# EAGLE board badge_2013 (EAGLE 6.4)
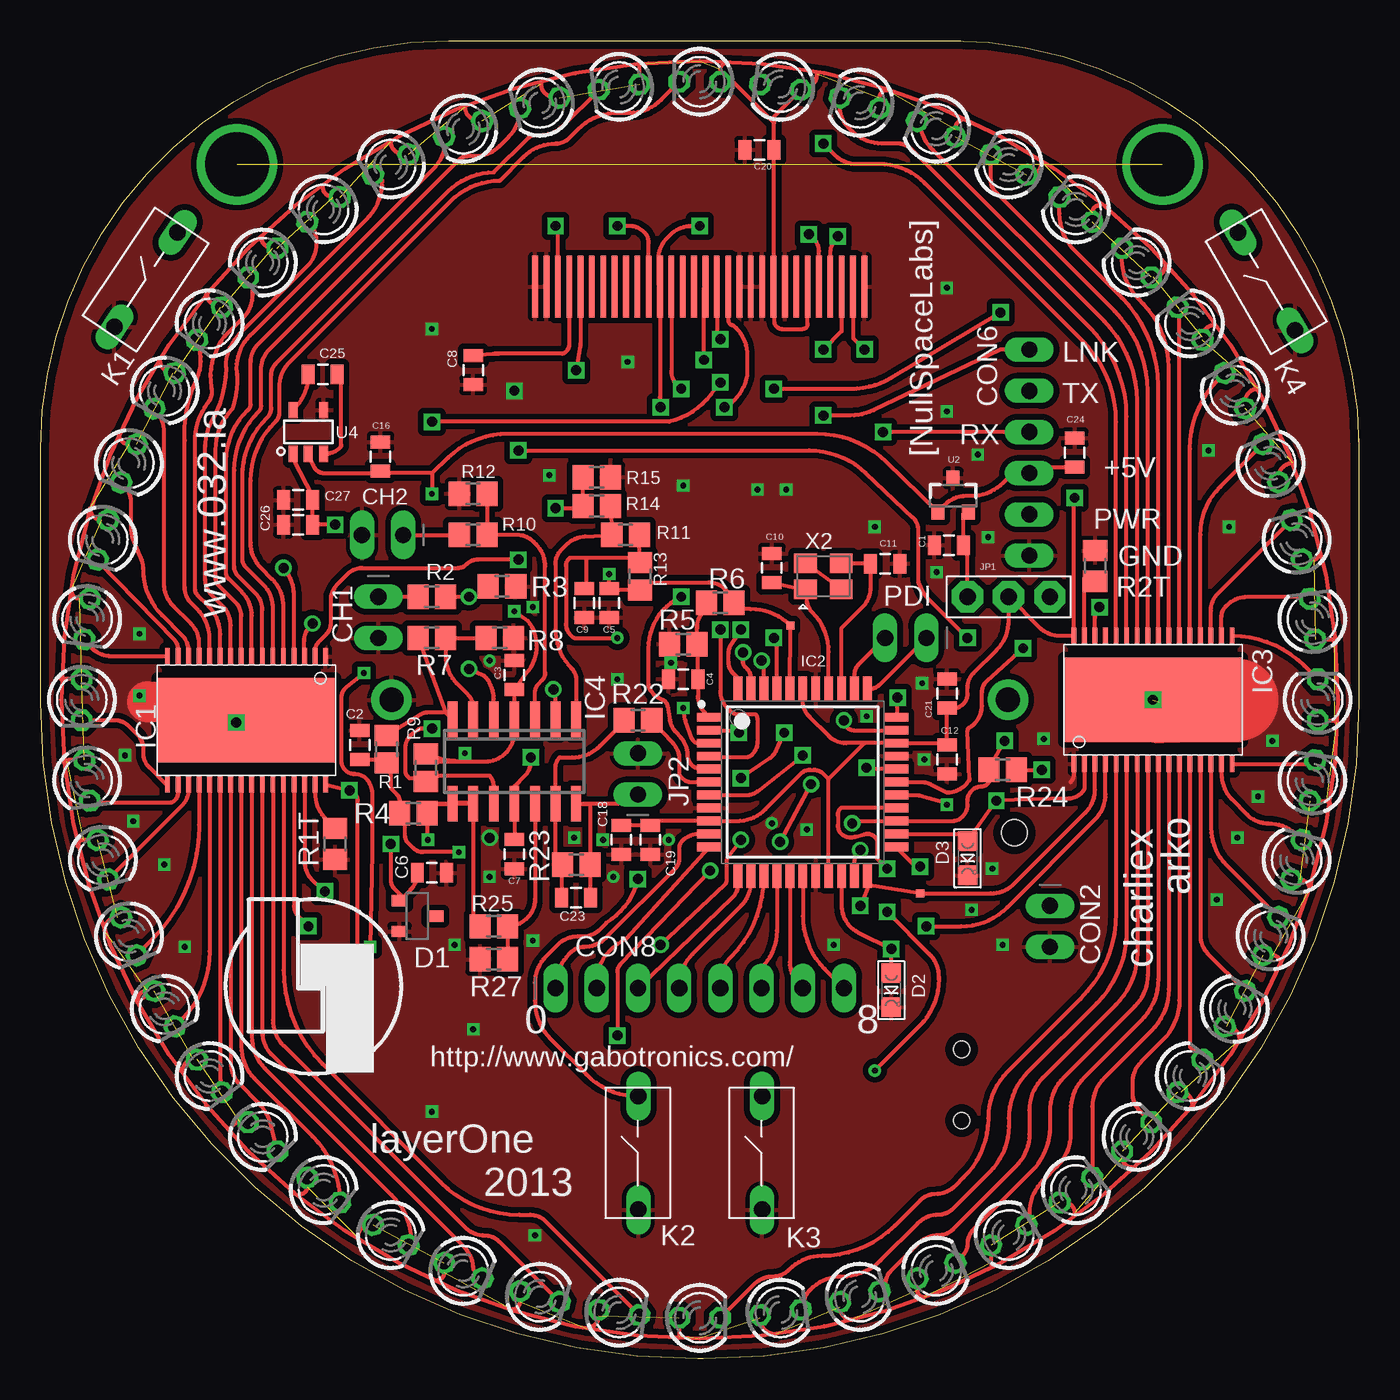
[diagram p0: board, top side]
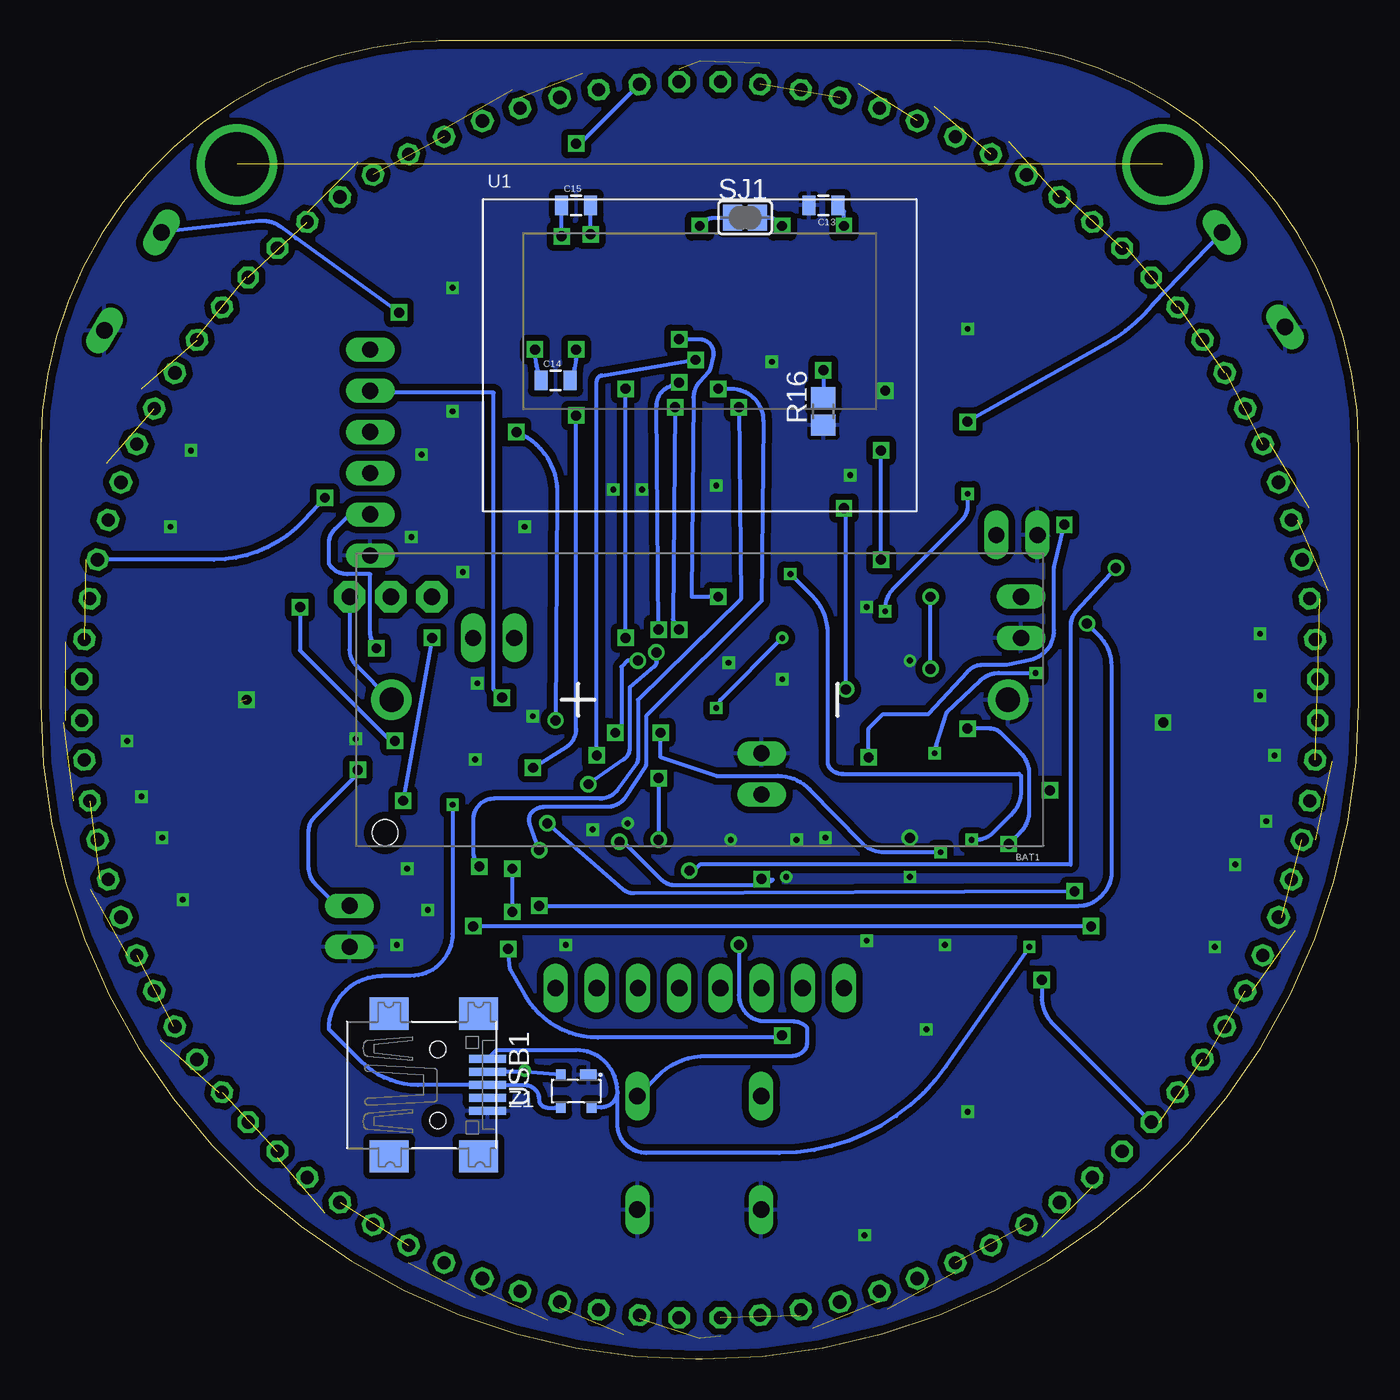
[diagram p1: board, bottom side, seen from below]

Size 81.28 x 81.28 mm. Coordinates in mm from the lower left corner, seen from the top.
Outline: 56.73,81.28 25.15,81.28 arc90 0,56.13 0,40.5 arc90 40.5,0 40.86,0 arc90 81.28,40.42 81.28,56.73
Outline: 56.13,81.28 arc-90 81.28,56.13
Copper layers (1*16): Top 0.0356mm / dielectric 1.5011mm / Bottom 0.0356mm
Design rules "SilverCircuits": minimum track width 7mil, minimum drill 14mil, track to track 7mil, track to pad 7mil, pad to pad 7mil, via to via 7mil, smd to smd 0mil, copper to edge 20mil, drill to drill 8mil, minimum pad ring 10mil, minimum via ring 8mil, stop-mask expansion 4mil, vias tented up to drill 0mil, thermal gap 10mil
Net classes: 0 default: width 0.254 mm, drill 0.305 mm, clearance 0.152 mm
Milling: 10 lines

## Footprints (pad centres in the part's own frame; a part is rotated, then mirrored left to right if it is on the bottom)
BATTERY_CR123A = drill 1.5 pad 2.5: + 19,0; - -19,0 | hole 1.575: 19.4,8.2
0805 = smd 0.8 x 1.2: 1 -0.9,0; 2 0.9,0
1X02_OVAL = drill 1 long: 1 -1.27,0; 2 1.27,0
1X06_OVAL = drill 1 long: 1 -6.35,0; 2 -3.81,0; 3 -1.27,0; 4 1.27,0; 5 3.81,0; 6 6.35,0
1X08_OVAL = drill 1 long: 1 -8.89,0; 2 -6.35,0; 3 -3.81,0; 4 -1.27,0; 5 1.27,0; 6 3.81,0; 7 6.35,0; 8 8.89,0
DBZ_R-PDSO-G3 = smd 0.7 x 1: 1 -0.95,-1.1; 2 0.95,-1.1; 3 0,1.1
CHIPLED_0805 = smd 1.2 x 1.2: A 0,-1.05; C 0,1.05
HTSSOP32DAP = smd 0.3 x 1: 1 -4.875,-3.95; 2 -4.225,-3.95; 3 -3.575,-3.95; 4 -2.925,-3.95; 5 -2.275,-3.95; 6 -1.625,-3.95; 7 -0.975,-3.95; 8 -0.325,-3.95; 9 0.325,-3.95; 10 0.975,-3.95; 11 1.625,-3.95; 12 2.275,-3.95; 13 2.925,-3.95; 14 3.575,-3.95; 15 4.225,-3.95; 16 4.875,-3.95; 17 4.875,3.95; 18 4.225,3.95; 19 3.575,3.95; 20 2.925,3.95; 21 2.275,3.95; 22 1.625,3.95; 23 0.975,3.95; 24 0.325,3.95; 25 -0.325,3.95; 26 -0.975,3.95; 27 -1.625,3.95; 28 -2.275,3.95; 29 -2.925,3.95; 30 -3.575,3.95; 31 -4.225,3.95; 32 -4.875,3.95 | smd 11 x 5.2: EXP 0,0
NONOLITH_TQFP-44 = smd 1.55 x 0.55: 1 -5.75,4; 2 -5.75,3.2; 3 -5.75,2.4; 4 -5.75,1.6; 5 -5.75,0.8; 6 -5.75,0; 7 -5.75,-0.8; 8 -5.75,-1.6; 9 -5.75,-2.4; 10 -5.75,-3.2; 11 -5.75,-4; 23 5.75,-4; 24 5.75,-3.2; 25 5.75,-2.4; 26 5.75,-1.6; 27 5.75,-0.8; 28 5.75,0; 29 5.75,0.8; 30 5.75,1.6; 31 5.75,2.4; 32 5.75,3.2; 33 5.75,4 | smd 0.55 x 1.55: 12 -4,-5.75; 13 -3.2,-5.75; 14 -2.4,-5.75; 15 -1.6,-5.75; 16 -0.8,-5.75; 17 0,-5.75; 18 0.8,-5.75; 19 1.6,-5.75; 20 2.4,-5.75; 21 3.2,-5.75; 22 4,-5.75; 34 4,5.75; 35 3.2,5.75; 36 2.4,5.75; 37 1.6,5.75; 38 0.8,5.75; 39 0,5.75; 40 -0.8,5.75; 41 -1.6,5.75; 42 -2.4,5.75; 43 -3.2,5.75; 44 -4,5.75
SO14 = smd 0.6 x 2.2: 1 -3.81,-2.6; 2 -2.54,-2.6; 3 -1.27,-2.6; 4 0,-2.6; 5 1.27,-2.6; 6 2.54,-2.6; 7 3.81,-2.6; 8 3.81,2.6; 9 2.54,2.6; 10 1.27,2.6; 11 0,2.6; 12 -1.27,2.6; 13 -2.54,2.6; 14 -3.81,2.6
JUMPER3 = drill 1 pad 1.93 octagon: 1 -2.54,0; 2 0,0; 3 2.54,0
B3F-5XX = drill 1.016 long: 1 -3.501,-0.029; 2 3.501,-0.029
LED3MM = drill 0.813 octagon: A -1.27,0; K 1.27,0
R0805 = smd 1.3 x 1.5: 1 -0.85,0; 2 0.85,0
R0805' = smd 1.3 x 1.5: 1 -0.95,0; 2 0.95,0
SOLDERJUMPER_REFLOW = smd 1.168 x 1.6: 1 -0.762,0; 2 0.762,0
PAD.02X.02 = smd 0.508 x 0.508: P$1 0,0
MICROBUILDER_UG-2864HSWEG01_0.96IN_WRAPAROUND = smd 0.35 x 3.81 bottom: 1 -10.15,8.96; 2 -9.45,8.96; 3 -8.75,8.96; 4 -8.05,8.96; 5 -7.35,8.96; 6 -6.65,8.96; 7 -5.95,8.96; 8 -5.25,8.96; 9 -4.55,8.96; 10 -3.85,8.96; 11 -3.15,8.96; 12 -2.45,8.96; 13 -1.75,8.96; 14 -1.05,8.96; 15 -0.35,8.96; 16 0.35,8.96; 17 1.05,8.96; 18 1.75,8.96; 19 2.45,8.96; 20 3.15,8.96; 21 3.85,8.96; 22 4.55,8.96; 23 5.25,8.96; 24 5.95,8.96; 25 6.65,8.96; 26 7.35,8.96; 27 8.05,8.96; 28 8.75,8.96; 29 9.45,8.96; 30 10.15,8.96
SOT23-3 = smd 0.8 x 0.9: 1 -0.95,-1; 2 0.95,-1; 3 0,1.1
SOT-23-5 = smd 0.55 x 1: 1 -0.95,-1.35; 2 0,-1.35; 3 0.95,-1.35; 4 0.95,1.35; 5 -0.95,1.35
USB-MINIB = smd 0.5 x 2.308: D+ 0,4.064; D- -0.8,4.064; GND 1.6,4.064; ID 0.8,4.064; VBUS -1.6,4.064 | smd 2 x 2.4: GND1 -4.4,-2; GND2 -4.4,3.5; GND3 4.4,3.5; GND4 4.4,-2 | hole 1: -2.2,1; 2.2,1
NX3225GA = smd 1.4 x 1.2: 1 -1.1,-0.8; 2 1.1,-0.8; 3 1.1,0.8; 4 -1.1,0.8
SOT143B = smd 1 x 0.7: 1 -0.75,-1 | smd 0.6 x 0.7: 2 0.95,-1; 3 0.95,1; 4 -0.95,1

## Placement (x,y rotation side)
BAT1  CR123A  [BATTERY_CR123A]  40.64,40.64 180 bottom
C1  1uF  [0805]  56.01,50.16 0 top
C2  330pF  [0805]  19.69,37.85 90 top
C3  1uF  [0805]  29.21,42.16 90 top
C4  330pF  [0805]  39.62,41.91 0 top
C5  0.1uF  [0805]  35.05,46.61 270 top
C6  1uF  [0805]  24.13,29.97 0 top
C7  1uF  [0805]  29.21,31.12 270 top
C8  4.7uF  [0805]  26.67,60.96 270 top
C9  330pF  [0805]  33.53,46.61 270 top
C10  10pF  [0805]  45.09,48.77 270 top
C11  10pF  [0805]  52.07,49.02 180 top
C12  0.1uF  [0805]  55.88,36.96 270 top
C13  4.7uF  [0805]  33.02,71.12 180 bottom
C14  1uF  [0805]  49.53,60.33 0 bottom
C15  1uF  [0805]  48.26,71.12 0 bottom
C16  4.7pF  [0805]  20.96,55.63 270 top
C18  0.1uF  [0805]  35.81,32 90 top
C19  0.1uF  [0805]  37.59,32 90 top
C20  4.7uF  [0805]  44.32,74.55 180 top
C21  0.1uF  [0805]  55.88,41.02 270 top
C23  10pF  [0805]  33.02,28.45 0 top
C24  0.1uF  [0805]  63.75,55.88 270 top
C25  4.7uF  [0805]  17.4,60.71 180 top
C26  0.1uF  [0805]  15.88,51.44 0 top
C27  4.7uF  [0805]  15.88,52.96 0 top
CH1  CON2  [1X02_OVAL]  20.83,45.72 270 top
CH2  CON2  [1X02_OVAL]  21.08,50.8 180 top
CON2  EXT  [1X02_OVAL]  62.23,26.67 270 top
CON6  J8  [1X06_OVAL]  60.96,55.88 90 top
CON8  J3  [1X08_OVAL]  40.64,22.86 0 top
D1  LM4040d20  [DBZ_R-PDSO-G3]  23.24,27.3 270 top
D2  red  [CHIPLED_0805]  52.45,22.73 180 top
D3  grn  [CHIPLED_0805]  57.15,30.86 180 top
IC1  [HTSSOP32DAP]  12.7,39.37 180 top
IC2  [NONOLITH_TQFP-44]  46.99,35.56 0 top
IC3  [HTSSOP32DAP]  68.58,40.64 0 top
IC4  TL064D  [SO14]  29.21,36.83 180 top
JP1  [JUMPER3]  59.69,46.99 0 top
JP2  [1X02_OVAL]  36.83,36.07 90 top
K1  [B3F-5XX]  6.48,66.55 56.2 top
K2  [B3F-5XX]  36.83,12.7 90 top
K3  [B3F-5XX]  44.45,12.7 90 top
K4  [B3F-5XX]  75.56,66.42 120.2 top
LED1  [LED3MM]  40.64,78.74 180 top
LED2  [LED3MM]  35.67,78.41 187.5 top
LED3  [LED3MM]  30.78,77.44 195 top
LED4  [LED3MM]  26.06,75.84 202.5 top
LED5  [LED3MM]  21.59,73.63 210 top
LED6  [LED3MM]  17.45,70.87 217.5 top
LED7  [LED3MM]  13.7,67.58 225 top
LED8  [LED3MM]  10.41,63.83 232.5 top
LED9  [LED3MM]  7.65,59.69 240 top
LED10  [LED3MM]  5.44,55.22 247.5 top
LED11  [LED3MM]  3.84,50.5 255 top
LED12  [LED3MM]  2.87,45.61 262.5 top
LED13  [LED3MM]  2.54,40.64 270 top
LED14  [LED3MM]  2.87,35.67 277.5 top
LED15  [LED3MM]  3.84,30.78 285 top
LED16  [LED3MM]  5.44,26.06 292.5 top
LED17  [LED3MM]  7.65,21.59 300 top
LED18  [LED3MM]  10.41,17.45 307.5 top
LED19  [LED3MM]  13.7,13.7 315 top
LED20  [LED3MM]  17.45,10.41 322.5 top
LED21  [LED3MM]  21.59,7.65 330 top
LED22  [LED3MM]  26.06,5.44 337.5 top
LED23  [LED3MM]  30.78,3.84 345 top
LED24  [LED3MM]  35.67,2.87 352.5 top
LED25  [LED3MM]  40.64,2.54 0 top
LED26  [LED3MM]  45.61,2.87 7.5 top
LED27  [LED3MM]  50.5,3.84 15 top
LED28  [LED3MM]  55.22,5.44 22.5 top
LED29  [LED3MM]  59.69,7.65 30 top
LED30  [LED3MM]  63.83,10.41 37.5 top
LED31  [LED3MM]  67.58,13.7 45 top
LED32  [LED3MM]  70.87,17.45 52.5 top
LED33  [LED3MM]  73.63,21.59 60 top
LED34  [LED3MM]  75.84,26.06 67.5 top
LED35  [LED3MM]  77.44,30.78 75 top
LED36  [LED3MM]  78.41,35.67 82.5 top
LED37  [LED3MM]  78.74,40.64 90 top
LED38  [LED3MM]  78.41,45.61 97.5 top
LED39  [LED3MM]  77.44,50.5 105 top
LED40  [LED3MM]  75.84,55.22 112.5 top
LED41  [LED3MM]  73.63,59.69 120 top
LED42  [LED3MM]  70.87,63.83 127.5 top
LED43  [LED3MM]  67.58,67.58 135 top
LED44  [LED3MM]  63.83,70.87 142.5 top
LED45  [LED3MM]  59.69,73.63 150 top
LED46  [LED3MM]  55.22,75.84 157.5 top
LED47  [LED3MM]  50.5,77.44 165 top
LED48  [LED3MM]  45.61,78.41 172.5 top
PDI  CON6  [1X02_OVAL]  53.34,44.45 180 top
R1  3K  [R0805]  21.34,37.59 270 top
R1T  20K  [R0805']  18.16,31.75 90 top
R2  820K  [R0805]  24.13,46.99 0 top
R2T  20K  [R0805']  65.02,48.9 270 top
R3  180K  [R0805]  28.45,47.62 0 top
R4  3K  [R0805]  22.99,33.66 180 top
R5  3K  [R0805]  39.62,44.07 0 top
R6  3K  [R0805]  41.91,46.61 180 top
R7  20K  [R0805]  24.13,44.45 180 top
R8  180k  [R0805]  28.32,44.45 180 top
R9  20.0K  [R0805]  23.75,36.45 270 top
R10  820K  [R0805]  26.67,50.8 0 top
R11  3K  [R0805]  36.07,50.8 0 top
R12  180K  [R0805]  26.67,53.34 180 top
R13  3K  [R0805]  36.96,48.26 90 top
R14  20K  [R0805]  34.29,52.58 0 top
R15  180k  [R0805]  34.29,54.36 180 top
R16  820k  [R0805]  33.02,58.42 90 bottom
R22  180K  [R0805]  36.83,39.37 0 top
R23  360K  [R0805]  33.02,30.48 180 top
R24  3K  [R0805]  59.31,36.32 180 top
R25  360K  [R0805]  27.94,26.67 0 top
R27  180K  [R0805]  27.94,24.64 180 top
SJ1  [SOLDERJUMPER_REFLOW]  37.85,70.36 0 bottom
TP1  TP-2.048V  [PAD.02X.02]  46.23,45.21 0 top
TP2  [PAD.02X.02]  54.23,28.7 0 top
U1  UG-2864HSWEG01  [MICROBUILDER_UG-2864HSWEG01_0.96IN_WRAPAROUND]  40.64,57.15 0 bottom
U2  AP7333-33SOT23-3  [SOT23-3]  56.26,53.21 0 top
U4  TPS60403  [SOT-23-5]  16.51,57.15 0 top
USB1  [USB-MINIB]  57.78,16.89 270 bottom
X2  NX3225GA  [NX3225GA]  48.26,48.26 0 top
Z1  PRTR5V0U2X  [SOT143B]  48.26,16.51 180 bottom

## Library data of the parts
BAT1 = tvbgone-adj
C1-C16 C18-C21 C23-C27 TP1 TP2 U2 = SparkFun
CH1 CH2 CON2 CON6 CON8 D2 D3 JP1 JP2 PDI SJ1 = microbuilder
D1 = texas; MF: TEXAS INSTRUMENT CONNECTORS; MPN: LM4041D12QDBZT; OC_FARNELL: 1755118; OC_NEWARK: 43K3381
IC1 IC3 = 23b_clock_noleds
IC2 = Outline
IC4 = linear
K1-K4 = switch-omron
LED1-LED48 = led
R1-R16 R22-R25 R27 = resistor
R1T R2T = rcl
U1 = badge.lbrbadge_2013
U4 = RHD2000_eval_board
USB1 = adafruit
X2 = M6-RF315
Z1 = USBug

## Nets
!CS: IC2.4 U1.13
!RES: IC2.5 U1.14
+2.048V: C5.1 IC2.40 IC4.8 IC4.9 R4.1 R6.1 R13.1 R25.1 TP1.P$1
+3.3V: C12.1 C18.2 C19.2 C20.1 C21.2 IC1.32 IC2.9 IC2.19 IC2.31 IC2.39 IC3.32 JP1.2 LED1.A LED2.A LED3.A LED4.A LED5.A LED6.A LED7.A LED8.A LED9.A LED10.A LED11.A LED12.A LED13.A LED14.A LED15.A LED16.A LED17.A LED18.A LED19.A LED20.A LED21.A LED22.A LED23.A LED24.A LED25.A LED26.A LED27.A LED28.A LED29.A LED30.A LED31.A LED32.A LED33.A LED34.A LED35.A LED36.A LED37.A LED38.A LED39.A LED40.A LED41.A LED42.A LED43.A LED44.A LED45.A LED46.A LED47.A LED48.A U1.6 U1.9
+3V3_OUT: C1.2 JP1.1 U2.2
+5V: C3.1 C16.2 C24.2 CON6.3 IC4.4 R9.1 U2.1 U4.2 USB1.VBUS Z1.4
-5V: C7.1 C26.2 C27.2 IC4.11 U4.1
BATTERY3V: BAT1.+ JP1.3
BLANK: D3.A IC1.2 IC2.24 IC3.2
COL1: IC1.5 LED1.K
COL2: IC1.6 LED2.K
COL3: IC1.7 LED3.K
COL4: IC1.8 LED4.K
COL5: IC1.9 LED5.K
COL6: IC1.10 LED6.K
COL7: IC1.11 LED7.K
COL8: IC1.12 LED8.K
COL9: IC1.13 LED9.K
COL10: IC1.14 LED10.K
COL11: IC1.15 LED11.K
COL12: IC1.16 LED12.K
COL13: IC1.17 LED13.K
COL14: IC1.18 LED14.K
COL15: IC1.19 LED15.K
COL16: IC1.20 LED16.K
COL17: IC1.21 LED17.K
COL18: IC1.22 LED18.K
COL19: IC1.23 LED19.K
COL20: IC1.24 LED20.K
COL21: IC1.25 LED21.K
COL22: IC1.26 LED22.K
COL23: IC1.27 LED23.K
COL24: IC1.28 LED24.K
COL25: IC3.5 LED25.K
COL26: IC3.6 LED26.K
COL27: IC3.7 LED27.K
COL28: IC3.8 LED28.K
COL29: IC3.9 LED29.K
COL30: IC3.10 LED30.K
COL31: IC3.11 LED31.K
COL32: IC3.12 LED32.K
COL33: IC3.13 LED33.K
COL34: IC3.14 LED34.K
COL35: IC3.15 LED35.K
COL36: IC3.16 LED36.K
COL37: IC3.17 LED37.K
COL38: IC3.18 LED38.K
COL39: IC3.19 LED39.K
COL40: IC3.20 LED40.K
COL41: IC3.21 LED41.K
COL42: IC3.22 LED42.K
COL43: IC3.23 LED43.K
COL44: IC3.24 LED44.K
COL45: IC3.25 LED45.K
COL46: IC3.26 LED46.K
COL47: IC3.27 LED47.K
COL48: IC3.28 LED48.K
D+: IC2.27 USB1.D+ Z1.3
D-: IC2.26 USB1.D- Z1.2
D/C: IC2.7 U1.15
DAC: IC2.6 R22.2
DAT: IC2.34 PDI.1
DB2: SJ1.2 U1.20
DB3: U1.21
DB4: U1.22
DB5: U1.23
DB6: U1.24
DB7: U1.25
DGND: X2.2 X2.4
E: U1.17
GND: BAT1.- C1.1 C2.2 C3.2 C4.1 C5.2 C6.2 C7.2 C8.2 C9.2 C10.1 C11.1 C12.2 C13.2 C16.1 C18.1 C19.1 C20.2 C21.1 C24.1 C26.1 C27.1 CH1.2 CH2.2 CON2.2 CON6.1 D1.2 D2.C D3.C IC1.1 IC2.8 IC2.18 IC2.30 IC2.38 IC3.1 JP2.2 K1.1 K2.1 K3.1 K4.1 R1T.1 R2T.1 R3.2 R5.1 R8.1 R12.2 R15.1 R16.1 R27.2 U1.1 U1.8 U1.10 U1.11 U1.12 U1.29 U1.30 U2.3 U4.4 USB1.GND Z1.1
J3: CON8.5 IC2.14
LNK: CON6.6 IC2.29
N$1: IC3.31 R2T.2
N$2: C14.1 U1.2
N$3: C14.2 U1.3
N$4: C15.1 U1.4
N$5: C15.2 U1.5
N$6: CON2.1 R24.1
N$7: C23.2 IC4.14 JP2.1 R23.1
N$8: C25.2 U4.5
N$9: C25.1 U4.3
N$10: CON8.1 IC2.10
N$11: CON8.2 IC2.11
N$12: CON8.3 IC2.12
N$13: IC1.31 R1T.2
N$14: CON8.4 IC2.13
N$16: CON8.6 IC2.15
N$17: CON8.7 IC2.16
N$18: CON8.8 IC2.17
N$20: IC4.12 R25.2 R27.1
N$23: C6.1 D1.1 IC4.10 R9.2
N$24: C23.1 IC4.13 R22.1 R23.2
N$25: IC4.5 R2.2 R3.1
N$26: CH1.1 R2.1
N$27: IC4.3 R10.2 R12.1
N$28: IC4.6 R7.1 R8.2
N$29: IC4.7 R1.1 R7.2
N$30: CH2.1 R10.1
N$31: IC4.2 R14.1 R15.2
N$32: R16.2 U1.26
N$33: C8.1 U1.27
N$34: C13.1 U1.28
N$35: IC4.1 R11.1 R14.2
N$36: C11.2 IC2.36 X2.3
N$37: C10.2 IC2.37 X2.1
N$38: IC2.35 PDI.2
PA1: IC2.41 K4.2
PA2: IC2.42 K3.2
PA3: IC2.43 K2.2
PA4: IC2.44 K1.2
PA5: C4.2 IC2.1 R5.2 R6.2
PA6: C2.1 IC2.2 R1.2 R4.2
PA7: C9.1 IC2.3 R11.2 R13.2
PWR: CON6.2 IC2.28
R/W: U1.16
RX: CON6.4 IC2.32
SCLK: IC1.3 IC2.22 IC3.3 TP2.P$1
SCLK/DB0: IC2.21 U1.18
SDIN/DB1: IC2.23 SJ1.1 U1.19
SIN: D2.A IC1.4 IC2.20
SOUT: IC1.29 IC3.4
SOUT_2: IC3.29
TX: CON6.5 IC2.33
XLAT: IC1.30 IC2.25 IC3.30 R24.2

## Tracks (layer width: path | path; a pad name or v marks a point on that pad's centre or on a via)
!CS  (via drill 0.61)
  Top 0.254: U1.13 42.39,64.13 arc45 42.55,63.75 arc-45 42.76,63.66 42.88,63.55 arc-45 43.56,61.89 43.56,60.62 arc-38 42.61,58.95 v42.16,58.67 | v41.91,44.96 41.91,41.17 arc54 42.55,39.93 42.66,39.85 arc36 42.97,39.75 44.07,39.75 arc-45 44.2,39.44 44.2,38.06 arc-45 43.86,37.26 43.85,37.25 arc-45 43.45,37.08 41.4,37.08 | 41.4,37.08 41.27,37.21 | IC2.4 41.32,37.08 41.4,37.08
  Bottom 0.254: v42.16,58.67 42.29,45.59 v41.91,44.96
!RES  (via drill 0.61)
  Top 0.254: v39.5,46.99 39.41,46.95 arc63 37.47,43.8 37.47,41.67 arc37 37.63,41.19 37.7,41.09 arc27 38.07,40.78 38.37,40.63 arc-54 38.65,40.25 38.8,39.35 arc32 39.11,38.71 39.47,38.3 arc-42 39.88,37.23 arc85 40.66,36.38 41.4,36.32 41.28,36.32 IC2.5 | U1.14 41.69,63.14 41.71,62.99 v41.91,62.87
  Bottom 0.254: v41.91,62.87 40.63,62.87 arc63 39.91,62.41 39.89,62.39 arc39 39.82,61.79 39.97,61.12 arc29 40.12,60.84 40.66,60.22 arc-41 41.03,59.28 41.15,46.99 v39.5,46.99
+2.048V  (via drill 0.36)
  Top 0.254: 23.65,34.23 IC4.8 IC4.9 | 23.65,34.23 R4.1 | 42.67,46.99 42.21,47.45 arc45 41.18,47.88 37.43,47.88 R13.1 34.92,47.41 | 42.67,46.7 42.67,46.23 43.77,46.23 arc-45 TP1.P$1 IC2.40 | IC4.9 24,34.16 | IC4.9 25.4,34.29 26.61,34.29 IC4.9 | 42.67,46.99 42.67,46.7 | 42.67,46.7 R6.1 | IC4.9 26.67,26.67 R25.1 | 34.92,47.41 C5.1 | 34.92,47.41 35.05,47.54 v35.05,48.39 | v23.88,32 23.88,33.91 23.65,34.13 23.65,34.23 | 42.8,46.48 43.18,46.86 43.18,46.99 42.67,46.99
  Bottom 0.254: v35.05,48.39 33.72,47.05 arc45 32.77,44.76 32.77,36.84 arc-45 32.58,36.39 arc-45 31.81,36.07 20.96,36.07 20.83,35.94 20.83,35.01 arc45 21.42,33.57 22.54,32.45 arc45 23.62,32 v23.88,32
+3.3V  (via drill 0.61)  (47 unrouted)
  Top 0.254: U1.9 45.22,66.14 | 45.22,66.14 C20.1 45.22,76.2 | 45.22,76.2 45.22,76.6 LED48.A LED48.A arc90 47.88,79.25 | C18.2 C19.2 38.1,33.16 IC2.9 42.91,33.16 arc45 44.69,33.9 46.89,36.1 arc-45 47.44,36.32 47.67,36.32 arc-45 48.24,36.09 48.51,35.81 48.53,35.81 48.59,35.75 | IC2.19 48.59,35.75 | 50.8,37.96 IC2.31 55.65,37.96 C12.1 C21.2 56.25,40.12 arc45 56.9,40.39 arc45 57.15,41 57.15,41.38 arc-45 57.52,42.28 58.95,43.71 arc45 59.69,45.5 JP1.2 61.56,45.12 arc45 62.84,44.59 IC3.32 63.7,52.91 63.81,53.02 63.81,53.03 v63.75,53.09 | 45.22,76.2 42.68,78.74 LED1.A 41.91,79.5 arc-90 42.29,79.88 | v19.56,23.37 19.56,34.4 arc76 v19.05,35.05 IC1.32 | 48.59,35.75 50.8,37.96 | 50.8,37.96 49.65,37.96 arc-45 48.6,38.4 47.41,39.59 arc-45 46.99,40.59 IC2.39 46.99,41.4 | 45.22,66.14 45.22,64 arc90 45.72,63.5 46.99,63.5 arc90 47.29,63.8 U1.6 | 5.97,21.97 LED17.A 6.56,22.69 arc90 5.97,22.1 | 8.64,17.78 LED18.A 9.44,18.46 arc90 8.76,17.78 | LED13.A 1.27,41.91 | LED12.A 2.4,46.87 arc-90 1.91,47.37 | LED11.A 3.77,51.73 arc-90 3.05,52.45 | LED10.A 5.46,56.39 arc-90 4.83,57.02 | LED9.A 8.17,60.79 arc-90 7.37,61.59 | LED8.A 11.11,64.84 arc-90 10.29,65.66 | LED7.A 14.32,68.48 arc-90 13.59,69.22 | LED6.A 18.02,71.64 arc-90 17.4,72.26 | LED5.A 22.38,74.27 arc-90 21.59,75.06 | LED4.A 27.05,76.33 arc-90 26.16,77.22 | LED3.A 31.7,77.77 arc-90 30.86,78.61 | LED2.A 36.93,79.85 arc-90 36.96,79.88 | LED47.A 51.73,77.76 arc-90 52.2,78.23 | LED46.A 56.39,75.82 arc-90 57.02,76.45 | LED45.A 60.94,73 arc90 61.72,73.79 | LED44.A 64.84,70.68 arc-90 65.28,71.12 | LED43.A 68.59,66.68 arc90 69.34,67.44 | LED42.A 71.64,63 arc-90 72.39,63.75
  Top 0.254: LED41.A 74.27,59.03 arc-90 75.06,59.82 | LED40.A 76.33,54.35 arc-90 77.22,55.25 | LED38.A 79.6,44.35 arc-90 79.76,44.2 | LED37.A 79.76,39.37 arc-90 79.88,39.24 | LED36.A 79.26,34.41 arc-90 79.5,34.16 | LED35.A 77.63,29.55 arc-90 78.23,28.96 | LED34.A 75.95,24.89 arc-90 76.45,24.38 | LED33.A 73.11,20.49 arc-90 73.91,19.69 | LED32.A 70.3,16.44 arc-90 70.99,15.75 | LED31.A 66.68,12.44 arc90 67.31,11.81 | LED30.A 63.13,9.64 arc-90 63.75,9.02 | LED29.A 58.59,5.93 arc90 58.8,5.72 | LED28.A 54.05,4.25 arc90 54.48,3.81 | LED27.A 49.27,3.18 arc90 50.04,2.41 | LED26.A 44.35,2.51 arc90 45.34,1.52 | LED25.A 39.37,1.4 arc-90 39.24,1.27 | LED24.A 34.41,2.66 arc-90 33.66,1.91 | LED23.A 29.55,3.52 arc-90 29.08,3.05 | LED22.A 24.89,5.33 arc-90 24.38,4.83 | LED19.A 12.31,14.6 arc90 11.68,13.97 | LED14.A 1.75,36.93 arc90 1.65,36.83 | LED15.A 2.67,32.01 arc90 2.29,31.62 | LED16.A 4.76,27.23 arc90 3.94,26.42 | LED20.A 16.44,10.6 arc-90 16,10.16 | LED21.A 20.34,8.28 arc90 19.56,7.49 | LED39.A 78.48,49.27 arc90 78.74,49.53 | 40.64,1.27 arc180 40.64,80.01 arc180 40.64,1.27
  Bottom 0.254: v63.75,53.09 65.06,51.68 arc47 70.6,49.27 LED39.A | v19.56,23.37 19.56,22.32 arc-45 18.88,20.67 LED19.A
+3V3_OUT
  Top 0.254: U2.2 57.15,52.15 56.91,52.15 C1.2 57.15,50.16 JP1.1
+5V  (via drill 0.36)
  Top 0.254: 26.29,36.83 24.13,36.83 24.13,36.92 R9.1 24.89,36.96 26.29,36.83 | 26.29,36.83 27.41,36.83 arc90 29.21,38.63 IC4.4 C3.1 30.1,42.45 arc73 30.04,45.51 v29.21,46.1 | 20.84,54.61 17.51,54.61 arc-66 16.82,55.06 16.51,55.75 U4.2 | 24.13,54.61 25.14,55.57 arc-44 28.79,57.02 47.88,57.02 arc-44 52.16,55.28 U2.1 55.79,52.69 arc-45 57.05,53.21 57.4,53.21 arc45 59.36,54.02 59.94,54.61 CON6.3 arc-45 61.85,54.98 C24.2 | 24.13,54.61 20.84,54.61 | C16.2 20.84,54.61 | 24.13,54.61 v24.13,53.34 | 26.29,36.83 v26.16,37.34 | v19.94,42.29 18.84,41.39 arc51 18.54,40.77 18.54,36.88 arc90 19.36,36.07 19.38,36.07 arc-69 20.31,35.42 20.36,35.28 arc-21 20.45,34.8 20.45,31.24 v20.32,25.4
  Bottom 0.254: USB1.VBUS 53.16,19.05 48.26,19.05 arc90 45.72,16.51 | v24.13,53.34 24.13,52.6 arc45 24.5,51.7 28.68,47.52 arc-45 29.21,46.25 v29.21,46.1 | 45.72,16.51 45.72,14.5 arc-90 43.92,12.7 35.76,12.7 arc-55 25.46,18.06 v20.32,25.4 | v26.16,37.34 26.04,37.85 25.4,39.88 23.34,41.84 arc44 22.2,42.29 v19.94,42.29 | 45.72,16.51 arc90 46.72,15.51 Z1.4
-5V  (via drill 0.61)
  Top 0.254: v18.16,51.44 18.16,51.45 C26.2 C27.2 16.78,53.2 15.62,55.37 15.49,55.75 15.54,55.8 U4.1 | v30.23,37.08 30.23,36.79 arc-45 29.89,35.99 29.21,35.31 IC4.11 C7.1 29.21,31.75
  Bottom 0.254: v30.23,37.08 30.23,38.86 29.34,39.75 26.54,39.75 24.12,42.39 arc47 23.2,42.8 21.72,42.8 20.24,43.12 arc-78 18.8,44.91 18.8,48.77 v18.16,51.44
BATTERY3V
  Bottom 0.254: JP1.3 62.23,43.71 arc-45 61.86,42.81 59.69,40.64 BAT1.+
BLANK  (via drill 0.61)
  Top 0.254: IC3.2 64.36,35.15 64.34,35.11 arc-60 63.35,34.54 v58.93,34.42 D3.A 57.15,32.36 IC2.24 | v29.46,56.01 47.39,56.01 arc-43 50.87,54.62 53.77,51.88 arc-47 54.1,51.1 54.1,48.03 arc27 54.17,47.75 54.38,47.32 arc18 54.64,46.96 v57.15,44.45 | v29.46,49.28 26.97,49.28 arc45 26.24,48.98 arc-45 25.74,48.77 19.83,48.77 arc45 18.93,48.4 18.33,47.8 arc45 17.91,46.77 17.91,45.41 arc-45 17.59,44.64 17.15,44.2 arc45 16.89,43.57 16.89,43.31 16.91,43.31 IC1.2
  Bottom 0.254: v29.46,49.28 v29.46,56.01 | v57.15,44.45 v58.93,34.42
COL1
  Top 0.254: IC1.5 14.98,46.41 arc45 14.29,48.07 13.6,48.75 arc-45 12.95,50.32 12.95,54.15 arc-45 14.45,57.75 14.52,57.82 arc45 14.73,58.35 14.73,59.96 arc-45 15.35,61.45 25.29,71.39 arc-45 28.32,72.64 29.79,74.11 arc-45 31.76,74.93 arc45 32.61,75.28 33.15,75.82 arc-45 35.6,76.84 36.35,76.84 arc45 38.25,77.62 LED1.K
COL2
  Top 0.254: IC1.6 14.32,46.33 arc45 13.75,47.72 12.66,48.81 arc-45 12.45,49.32 12.45,54.38 arc-45 13.96,58.03 13.99,58.06 arc45 14.22,58.63 14.22,60.66 arc-45 14.52,61.39 25.12,71.98 arc-45 27.94,73.15 30.06,75.27 arc-45 30.46,75.44 30.78,75.44 arc45 32.22,76.03 34.42,78.23 LED2.K
COL3
  Top 0.254: IC1.7 13.68,46.18 arc45 13.25,47.2 12.18,48.28 arc-45 11.94,48.85 11.94,54.78 arc-45 13.44,58.39 arc45 13.59,58.77 13.59,60.97 arc-45 14.12,62.25 25.8,73.93 arc-45 26.37,74.17 26.84,74.17 arc45 28.29,74.77 28.87,75.36 arc45 29.59,77.09 29.57,77.11 LED3.K
COL4
  Top 0.254: IC1.8 13.03,45.81 arc45 12.42,47.27 11.59,48.1 arc-45 11.43,48.48 11.43,55.25 arc-45 12.77,58.49 arc45 12.95,58.81 12.95,61.47 arc-45 13.4,62.55 24.21,73.36 arc45 25.02,75.31 24.98,75.35 LED4.K
COL5
  Top 0.254: IC1.9 12.38,45.81 arc45 12.03,46.65 10.95,47.72 arc-45 10.8,48.1 10.8,56.06 arc-42 11.81,58.55 arc29 12.07,61.09 arc-48 13.09,63.25 20.09,70.26 arc45 21.08,72.64 20.57,73.15 20.49,73.07 LED5.K
COL6
  Top 0.254: IC1.10 11.73,45.23 arc45 11.23,46.43 10.53,47.13 arc-45 10.16,48.02 10.16,56.26 | 10.16,56.26 10.16,56.37 | 10.16,56.26 arc-31 10.54,57.78 arc30 11.43,61.16 arc-45 12.28,63.21 16.46,67.39 arc45 17.02,68.73 17.02,68.88 arc45 16.51,70.1 16.45,70.1 LED6.K
COL7
  Top 0.254: IC1.11 11.07,44.68 arc45 10.36,46.41 9.69,47.08 arc-45 9.53,47.48 9.53,56.5 arc-37 10.29,58.93 arc60 10.54,59.91 arc-45 11.36,63.05 12.47,64.16 arc45 13.08,65.63 13.08,66.42 12.82,66.68 LED7.K
COL8
  Top 0.254: IC1.12 10.43,44.38 arc45 9.66,46.22 9.29,46.59 arc-45 8.89,47.56 8.89,56.62 arc-29 9.65,60.43 arc45 LED8.K
COL9
  Top 0.254: IC1.13 9.78,44.13 arc45 9.27,45.34 8.18,46.43 arc-45 7.62,47.78 7.62,57.12 arc45 LED9.K
COL10
  Top 0.254: IC1.14 9.12,43.66 arc45 8.73,44.61 7.49,45.85 arc-45 6.35,48.6 arc23 6.18,49.41 5.78,50.35 arc-23 5.59,51.29 5.59,52.82 arc45 5.17,53.83 LED10.K
COL11
  Top 0.254: IC1.15 8.48,43.79 arc45 8.26,44.32 3.56,49.15 3.51,49.2 LED11.K
COL12
  Top 0.254: IC1.16 4.34,43.32 arc-45 3.19,43.8 2.54,44.45 2.6,44.45 LED12.K
COL13
  Top 0.254: IC1.17 7.76,35.42 6.69,36.49 arc-45 6.35,37.31 6.35,37.6 arc45 6,38.45 5.42,39.03 arc45 4.59,39.37 LED13.K
COL14
  Top 0.254: IC1.18 8.48,34.92 arc-45 8.28,34.44 arc-45 7.92,34.29 3.17,34.29 3.05,34.42 LED14.K
COL15
  Top 0.254: IC1.19 9.12,35.14 arc-45 8.68,34.07 LED15.K
COL16
  Top 0.254: IC1.20 9.78,32.94 arc-45 6.8,25.76 LED16.K
COL17
  Top 0.254: IC1.21 10.43,25.13 arc-45 8.66,20.87 LED17.K
COL18
  Top 0.254: IC1.22 11.07,17.37 arc45 11.43,16.51 11.36,16.44 LED18.K
COL19
  Top 0.254: IC1.23 11.73,18.25 arc45 12.27,16.95 13.42,15.79 arc-31 14.16,14.49 LED19.K
COL20
  Top 0.254: IC1.24 12.38,19.24 arc45 13.17,17.31 16.77,13.71 arc-45 LED20.K
COL21
  Top 0.254: IC1.25 13.03,19.86 arc45 13.82,17.93 21.65,10.1 arc-45 22.86,7.18 LED21.K
COL22
  Top 0.254: IC1.26 13.68,20.11 arc45 14.21,18.8 26.08,6.94 arc-45 26.67,5.52 LED22.K
COL23
  Top 0.254: IC1.27 14.32,20.88 arc45 14.97,19.32 26.18,8.11 arc45 27.37,7.62 arc-45 28.27,7.25 LED23.K
COL24
  Top 0.254: IC1.28 14.98,23.98 arc45 17.38,18.18 24.67,10.89 arc45 29.5,8.89 30.2,8.89 arc-45 31.12,8.51 LED24.K
COL25
  Top 0.254: IC3.5 66.31,27.5 arc-45 64.11,22.2 59.6,17.69 arc45 58.42,14.85 arc-45 56.9,11.18 56.41,10.69 arc-45 55.14,10.16 arc45 54.24,9.79 52.66,8.21 arc-45 48.17,6.35 arc45 46.16,5.52 46.09,5.45 arc-45 45.19,5.08 arc45 43.92,4.55 LED25.K
COL26
  Top 0.254: IC3.6 66.95,26.38 arc-45 65.11,21.93 60.87,17.69 arc45 59.69,14.85 59.69,14.36 arc-45 58.51,11.52 56.25,9.26 arc-45 55.35,8.89 arc45 54.08,8.36 51.79,6.07 arc-45 49.39,5.08 arc45 47.46,4.28 arc45 46.99,3.15 LED26.K
COL27
  Top 0.254: IC3.7 67.61,25.03 arc-45 66.28,21.83 61.79,17.34 arc45 60.96,15.33 60.96,13.88 arc-45 60.13,11.87 56.25,7.99 arc-45 55.35,7.62 arc45 54.08,7.09 52.44,5.45 arc45 52.07,4.55 arc-45 52.04,4.48 LED27.K
COL28
  Top 0.254: IC3.8 68.25,23.67 arc-45 67.46,21.74 63.06,17.34 arc45 62.23,15.33 62.23,14.36 arc-45 61.05,11.52 57.52,7.99 arc45 57.15,7.09 arc-45 56.86,6.39 LED28.K
COL29
  Top 0.254: IC3.9 68.91,23.41 arc-45 67.84,20.85 64.33,17.34 arc45 63.5,15.33 63.5,13.88 arc-45 62.67,11.87 61.79,10.99 arc45 60.96,8.98 60.96,8.69 arc-45 LED29.K
COL30
  Top 0.254: IC3.10 69.56,22.79 arc-45 68.5,20.24 65.56,17.3 arc45 64.84,15.56 LED30.K
COL31
  Top 0.254: IC3.11 70.2,22.11 arc-45 69.19,19.66 67.84,18.31 arc45 67.31,17.04 67.31,16.38 arc45 67.74,15.34 LED31.K
COL32
  Top 0.254: IC3.12 70.86,19.24 LED32.K
COL33
  Top 0.254: IC3.13 71.5,26.08 arc45 71.94,25.01 LED33.K
COL34
  Top 0.254: IC3.14 72.16,32.73 arc45 73.1,30.46 LED34.K
COL35
  Top 0.254: IC3.15 72.81,36.04 arc45 73.44,34.51 74.4,33.55 arc45 75.68,33.02 arc-45 77.52,32.26 LED35.K
COL36
  Top 0.254: IC3.16 78.34,36.69 LED36.K
COL37
  Top 0.254: IC3.17 arc-45 77.9,42.75 LED37.K
COL38
  Top 0.254: IC3.18 72.81,45.74 arc-45 73.08,46.41 73.13,46.46 arc-45 74.4,46.99 78.13,46.99 LED38.K
COL39
  Top 0.254: IC3.19 72.16,46.14 arc-45 72.6,47.21 LED39.K
COL40
  Top 0.254: IC3.20 71.5,50.81 arc-45 72.73,53.77 LED40.K
COL41
  Top 0.254: IC3.21 70.86,56.1 arc-45 72.66,60.45 LED41.K
COL42
  Top 0.254: IC3.22 70.2,64.73 LED42.K
COL43
  Top 0.254: IC3.23 69.56,61.16 arc44 67.99,65.04 67.7,65.35 arc-52 LED43.K
COL44
  Top 0.254: IC3.24 68.91,60 arc45 66.66,65.42 63.78,68.3 arc-45 62.83,70.61 LED44.K
COL45
  Top 0.254: IC3.25 68.25,59.67 arc45 66.22,64.59 58.92,71.89 arc-45 58.59,72.68 LED45.K
COL46
  Top 0.254: IC3.26 67.61,59.06 arc45 65.57,63.97 55.02,74.52 arc-23 54.39,75.47 LED46.K
COL47
  Top 0.254: IC3.27 66.95,58.11 arc45 64.69,63.58 53.71,74.56 arc45 52.81,74.93 51.85,74.93 arc-45 50.06,75.67 49.81,75.92 arc-45 49.27,77.22 LED47.K
COL48  (via drill 0.61)
  Top 0.254: IC3.28 66.31,57.76 arc45 64.23,62.77 54.52,72.48 arc45 51.68,73.66 50.27,73.66 arc-45 49,74.19 v48.26,74.93
  Bottom 0.254: v48.26,74.93 48.01,74.93 LED48.K
D+  (via drill 0.36)
  Top 0.254: IC2.27 54.05,34.76 arc-15 54.23,34.74 55.88,34.29 v55.88,34.16
  Bottom 0.254: 55.88,34.29 v55.88,34.16 55.88,26.21 arc90 58.47,23.62 60.2,23.62 arc-90 63.5,20.32 61.53,18.35 arc-45 58.01,16.89 USB1.D+ 51.44,16.89 arc90 50.55,16 arc-90 50.04,15.49 49.53,15.49 49.28,15.49 49.23,15.49 Z1.3
D-  (via drill 0.36, 0.61)
  Top 0.254: IC2.26 49.33,33.96 arc45 49.15,33.53 49.15,32.9 arc82 49.78,32.17 arc25 50.28,32.2 50.76,32.35 arc-80 51.56,32 51.56,30.86 v52.2,30.23 | v52.2,27.56 54.77,24.98 arc-45 55.37,23.54 55.37,23.41 arc-45 54.17,20.52 v51.44,17.78
  Bottom 0.254: v52.2,30.23 v52.2,27.56 | Z1.2 51.39,17.69 | 51.39,17.69 USB1.D- | v51.44,17.78 51.39,17.74 51.39,17.69
D/C  (via drill 0.61)
  Top 0.254: IC2.7 43.53,34.76 arc38 44.2,34.99 v46.99,37.21 | v40.89,61.59 40.89,66.01 U1.15
  Bottom 0.254: v46.99,37.21 46.99,60.26 arc81 46.67,60.63 v40.89,61.59
DAC
  Top 0.254: R22.2 38.98,37.97 arc-43 39.37,36.98 39.37,36.13 arc53 39.52,35.83 39.67,35.71 arc37 40.13,35.56 IC2.6
DAT
  Top 0.254: IC2.34 51.1,41.31 arc45 51.73,41.57 PDI.1
DB2  (via drill 0.61)
  Top 0.254: U1.20 37.49,68.82 arc45 37.23,69.45 37.2,69.48 arc45 36.3,69.85 v35.56,69.85
  Bottom 0.254: v35.56,69.85 35.8,70.09 arc-45 36.45,70.36 SJ1.2
DGND
  Top 0.254: X2.2 X2.4
GND  (via drill 0.36, 0.6, 0.61)  (1 unrouted)
  Top 0.254: IC3.1 63.7,36.05 arc-45 63.5,35.56
  Top 2.54: 6.6,40.51 11.43,40.64
  Top 5.08: 68.96,40.51 73.79,40.64
  other vias: 27.69,32.13 29.21,59.69 51.44,51.31 39.62,53.85 36.2,61.47 55.88,58.42 55.88,66.04 24.13,63.5 35.56,41.91 25.53,25.53 30.48,7.62 8.89,25.4 7.62,30.48 5.72,33.15 6.1,44.7 6.1,40.89 5.21,37.21 75.06,34.67 75.95,38.1 73.79,32.13 72.52,28.32 57.4,27.69 58.67,30.23 61.85,38.23 59.31,25.53 24.13,15.24 26.67,20.32 30.35,46.36 27.69,43.05 54.48,36.96 34.67,32 54.36,41.66 47.24,32.64 45.09,33.02 48.9,25.53 30.35,25.78 27.69,29.72 38.86,42.93 55.25,48.51 58.42,50.67 57.78,55.75 73.28,51.31 72.01,56.01 50.93,39.62 38.73,32 45.97,53.59 44.2,53.59 31.37,54.48 32.89,32.13 35.31,29.72 68.58,40.64 12.07,39.24
  pour Top (isolate 0.356): 81.28,81.28 0,81.28 0,77.47 0,0 81.28,0
  pour Bottom (isolate 0.406): 81.28,81.28 0,81.28 0,0 81.28,0
GND1  (via drill 3.94)  (1 unrouted)
  other vias: 69.17,73.65 12.11,73.65
J3
  Top 0.254: CON8.5 41.91,23.21 arc-45 42.56,24.78 arc45 44.59,29.68 IC2.14
LNK  (via drill 0.61)
  Top 0.254: CON6.6 59.18,62.23 51.35,58.49 arc-26 49.92,58.17 v48.26,58.17 | IC2.29 51.02,36.36 arc-90 v50.93,36.45
  Bottom 0.254: v50.93,36.45 48.86,37.73 arc-58 48.26,38.81 v48.26,58.17
N$1
  Top 0.254: IC3.31 64.36,48.16 arc-90 R2T.2
N$2  (via drill 0.61)
  Top 0.254: U1.2 50.09,62.94 v50.8,62.23
  Bottom 0.254: v50.8,62.23 50.8,62.03 arc-20 50.56,60.67 C14.1
N$3  (via drill 0.61)
  Top 0.254: U1.3 49.39,63.36 v48.26,62.23
  Bottom 0.254: v48.26,62.23 48.26,61.81 arc20 48.43,60.88 C14.2
N$4  (via drill 0.61)
  Top 0.254: U1.4 48.69,68.11 arc-45 v49.15,69.22
  Bottom 0.254: v49.15,69.22 49.15,70.99 49.28,71.12 C15.1
N$5  (via drill 0.61)
  Top 0.254: U1.5 47.99,68.31 arc45 47.69,69.02 v47.37,69.34
  Bottom 0.254: v47.37,69.34 47.37,70.87 47.24,70.99 47.24,71 C15.2
N$6  (via drill 0.61)
  Top 0.254: R24.1 v61.72,36.32
  Bottom 0.254: CON2.1 62.38,27.94 arc45 63.43,28.37 64.34,29.28 arc45 64.77,30.33 64.77,32.49 arc45 64.4,33.39 61.72,36.07 v61.72,36.32
N$7
  Top 0.254: C23.2 33.92,30.11 34.29,30.48 R23.1 33.87,34.23 IC4.14 35.46,34.23 arc45 JP2.1
N$8
  Top 0.254: C25.2 arc-45 15.6,58.54 U4.5
N$9
  Top 0.254: U4.3 17.51,55.8 arc45 18.49,56.2 arc45 18.54,56.34 18.54,60.33 | 18.54,60.33 18.29,60.58 | C25.1 18.54,60.46 18.54,60.33
N$10
  Top 0.254: IC2.10 40.58,32.36 arc45 39.56,31.94 arc45 39.37,31.49 39.37,30.81 arc-45 39.13,30.25 34.84,25.95 arc-45 33.52,25.4 arc45 32.67,25.05 32.58,24.96 arc45 31.75,22.95 CON8.1
N$11
  Top 0.254: CON8.2 34.29,23.83 arc-45 36.11,25.93 IC2.11
N$12
  Top 0.254: IC2.12 43,29.32 arc-48 42.64,28.43 CON8.3
N$13
  Top 0.254: IC1.31 16.93,34.91 arc45 17.61,33.25 R1T.2
N$14
  Top 0.254: CON8.4 39.37,22.95 arc-45 40.2,24.96 43.21,27.97 arc45 43.79,29.38 IC2.13
N$16
  Top 0.254: IC2.15 45.39,26.4 arc-45 44.45,24.13 CON8.6
N$17
  Top 0.254: IC2.16 46.19,24.45 arc45 46.75,23.1 CON8.7
N$18
  Top 0.254: IC2.17 46.99,27.3 arc45 48.33,24.06 CON8.8
N$20
  Top 0.254: R27.1 R25.2 arc90 30.48,28.36 IC4.12
N$23  (via drill 0.61)
  Top 0.254: IC4.10 27.94,35.33 arc45 27.69,35.94 23.88,35.94 arc90 23.75,35.81 | C6.1 arc-46 22.8,28.92 22.34,28.46 | 22.34,28.46 D1.1 | v24.13,38.86 23.55,38.86 arc36 23.22,38.76 22.96,38.57 arc54 22.48,37.64 22.48,36.28 arc45 22.63,35.91 22.73,35.81 23.75,35.81 | v21.59,31.75 21.59,29.52 arc45 21.81,28.99 22.34,28.46 | 23.75,35.81 R9.2
  Bottom 0.254: v21.59,31.75 20.85,32.49 arc-45 20.32,33.76 20.32,36.09 arc-45 20.85,37.36 22.08,38.59 arc-45 22.73,38.86 v24.13,38.86
N$24
  Top 0.254: C23.1 32.12,30.48 R23.2 31.75,30.48 IC4.13 31.75,36.47 arc-45 32,37.08 32.78,37.08 arc45 34.49,37.79 35.69,38.99 35.69,39.5 35.81,39.37 R22.1
N$25  (via drill 0.61)
  Top 0.254: R2.2 v26.42,46.99 27.56,46.99 R3.1 | IC4.5 27.94,40.71 arc45 27.36,42.11 v26.42,42.55
  Bottom 0.254: v26.42,42.55 v26.42,46.99
N$26
  Top 0.254: CH1.1 R2.1
N$27
  Top 0.254: R12.1 R10.2 27.52,50.89 27.56,50.93 27.69,50.8 29.36,50.8 arc-45 30.41,50.37 30.56,50.22 arc-45 31.12,48.87 31.12,42.3 arc-45 30.93,41.85 30.7,41.62 arc45 30.48,41.09 IC4.3
N$28
  Top 0.254: R8.2 R7.1 24.98,43.27 arc45 25.65,41.66 26.3,41.01 arc-45 26.67,40.11 IC4.6 26.67,39.37
N$29
  Top 0.254: R7.2 24.98,39.85 | 24.98,39.85 IC4.7 | 24.98,39.85 23.83,39.85 arc32 23.47,39.75 R1.1
N$30
  Top 0.254: CH2.1 R10.1
N$31  (via drill 0.61)
  Top 0.254: R15.2 R14.1 33.4,52.58 33.27,52.45 v31.75,52.45 | IC4.2 31.75,41.15 v31.62,41.27
  Bottom 0.254: v31.62,41.27 31.62,52.32 v31.75,52.45
N$32  (via drill 0.61)
  Top 0.254: U1.26 33.29,62.59 arc-10 33.27,62.41 v33.02,60.96
  Bottom 0.254: v33.02,60.96 R16.2
N$33
  Top 0.254: U1.27 32.59,62.53 arc-45 32.43,62.15 32.33,62.05 arc-45 32.15,61.98 28.26,61.98 arc5 27.87,61.96 26.67,61.85 C8.1
N$34  (via drill 0.61)
  Top 0.254: U1.28 31.89,69.71 v31.75,69.85
  Bottom 0.254: v31.75,69.85 31.75,70.75 C13.1
N$35
  Top 0.254: 33.15,39.24 33.02,39.37 IC4.1 33.02,41.88 arc45 32.73,42.59 arc-45 31.75,44.94 31.75,49 arc-45 32.12,49.9 32.41,50.19 arc-42 33.58,50.71 R11.1 R14.2
N$36
  Top 0.254: X2.3 50.8,49.06 | 50.8,49.06 51.13,49.06 C11.2 | IC2.36 49.39,45.07 50.7,46.38 arc45 51.18,47.55 51.18,49.02 50.84,49.02 50.8,49.06
N$37
  Top 0.254: IC2.37 48.59,43.6 arc45 47.59,46 arc-45 47.24,46.85 47.24,46.99 | 47.24,46.99 47.24,47.5 | 47.24,47.5 47.24,47.62 47.12,47.5 47.24,47.5 | C10.2 46.75,47.49 47.12,47.12 | 47.12,47.12 47.24,46.99 | X2.1 47.16,47.16 47.12,47.12
N$38
  Top 0.254: IC2.35 50.19,42.2 arc-45 50.45,42.83 PDI.2
PA1  (via drill 0.61)
  Top 0.254: v45.21,59.82 49.97,59.82 arc31 52.46,60.5 v59.18,64.52 | IC2.41 45.39,43.94 v45.21,44.45
  Bottom 0.254: v45.21,44.45 v45.21,59.82 | v59.18,64.52 65.53,69.09 66.45,69.78 arc-43 67.81,70.15 K4.2
PA2  (via drill 0.61)
  Top 0.254: IC2.42 44.59,42.9 arc85 v44.45,43.05 | v45.85,38.61 45.35,37.51 arc-31 44.94,37.03 v43.18,35.81 | v43.18,32 42.44,31.05 arc38 42.29,30.63 42.29,29.51 arc-47 42.16,29.22 v38.23,25.53
  Bottom 0.254: v44.45,43.05 45.09,43.05 45.47,42.67 45.47,38.99 v45.85,38.61 | v43.18,35.81 v43.18,32 | v38.23,25.53 38.23,22.42 arc-90 36.64,20.83 34.94,20.83 arc45 34.05,20.46 arc45 34.04,20.43 34.04,19.45 arc45 34.23,18.99 arc45 34.99,18.67 40.22,18.67 arc-45 43.28,17.4 K3.2
PA3  (via drill 0.61)
  Top 0.254: IC2.43 43.79,42.01 arc45 43.58,42.53 43.42,42.68 arc-45 43.31,42.97 v43.31,43.56 | v47.5,35.43 v45.59,31.88 | v36.83,29.59 arc51 36.83,29.54 36.83,29.61 arc-45 34.88,26.88 34.5,26.5 arc-45 33.38,26.04 33.09,26.04 arc45 31.89,25.54 31.13,24.78 arc45 30.48,23.21 30.48,22.08 arc45 31.46,19.73 33.65,17.53 arc45 K2.2
  Bottom 0.254: v47.5,35.43 45.34,36.94 arc-55 44.96,37.68 44.96,41.4 43.45,42.68 arc-50 43.31,42.98 v43.31,43.56 | v45.59,31.88 45.34,31.88 43.04,29.58 arc-45 42.15,29.21 37.13,29.21 arc-37 36.14,29.54 v36.83,29.59
PA4  (via drill 0.61)
  Top 0.254: IC2.44 42.99,41.97 42.71,42.25 arc-45 42.42,42.96 42.42,43.52 arc-34 42.59,44.06 v43.18,44.96 | v41.91,60.2 41.75,60.14 arc-50 38.75,57.78 v24.13,57.78
  Bottom 0.254: v43.18,44.96 43.3,58.76 arc72 42.43,59.98 v41.91,60.2 | v24.13,57.78 15.65,62.56 arc-21 12.74,64.98 12.7,65.02 K1.2
PA5
  Top 0.254: IC2.1 40.94,39.86 arc-45 40.52,40.87 C4.2 40.52,44.02 R5.2 40.47,45.04 arc-35 40.77,45.97 40.64,45.85 40.68,45.85 R6.2
PA6  (via drill 0.36, 0.61)
  Top 0.254: C2.1 20.88,36.95 R1.2 arc-90 21.42,36.83 21.59,36.83 | 21.38,36.62 21.59,36.83 | 21.59,36.83 21.59,35.18 arc45 21.59,35.18 arc-45 21.61,35.17 21.98,34.8 arc-45 22.14,34.41 R4.2 22.48,33.66 22.48,32.19 arc45 22.61,31.87 23,31.48 arc45 23.58,31.24 v25.78,31.24 | IC2.2 42.69,38.76 arc-45 v43.05,38.61
  Bottom 0.254: v25.78,31.24 29.26,31.24 arc46 30.68,31.84 33.87,35.12 arc-46 35.82,35.94 39.62,35.94 43.05,37.08 v43.05,38.61
PA7  (via drill 0.36)
  Top 0.254: v35.56,44.45 32.89,44.45 32.78,44.53 arc-53 32.38,45.33 32.38,48.9 arc-45 32.56,49.33 arc-45 32.74,49.4 33.66,49.4 | 36.83,49.53 36.92,49.62 R11.2 | 33.66,49.4 36.7,49.4 arc90 36.83,49.53 | 36.83,49.53 36.83,49.24 arc90 R13.2 | IC2.3 40.54,37.97 arc-69 40.16,38.23 39.76,39.34 arc-11 39.74,39.41 v39.62,40.13 | C9.1 33.66,47.64 33.66,49.4
  Bottom 0.254: v39.62,40.13 39.37,40.64 v35.56,44.45
PWR  (via drill 0.61)
  Top 0.254: IC2.28 54.31,35.56 arc-27 54.88,35.43 55.88,34.92 arc50 57.13,35.51 57.23,35.63 arc42 57.27,35.76 57.16,38.74 arc-63 57.26,38.92 arc60 58.04,40.27 58.04,41.1 arc-48 58.36,41.82 v60.58,43.81
  Bottom 0.254: v60.58,43.81 60.78,44.15 arc31 60.96,44.8 60.96,48.39 62.38,48.39 arc59 63.5,49.02 63.5,50.27 arc45 63.13,51.17 62.23,52.07 CON6.2
RX  (via drill 0.61)
  Top 0.254: CON6.4 v51.94,57.15 | v49.53,39.37 arc90 50.14,38.76 IC2.32
  Bottom 0.254: v51.94,57.15 arc69 49.42,53.4 v49.53,39.37
SCLK  (via drill 0.61)
  Top 0.254: IC3.3 65,35.09 arc-45 64.42,33.69 60.04,29.3 arc-45 58.59,28.7 TP2.P$1 50.95,29.21 IC2.22 50.99,29.02 v50.55,27.94 | IC1.3 16.26,43.34 16.26,44.27 arc-45 16.65,45.23 v16.76,45.34
  Bottom 0.254: v50.55,27.94 17.25,27.94 arc-45 15.98,28.47 15.77,28.68 arc-45 15.24,29.95 15.24,42.73 arc-45 16.01,44.58 v16.76,45.34
SCLK/DB0  (via drill 0.61)
  Top 0.254: U1.18 38.89,60.87 arc60 v39.5,59.82 | IC2.21 50.19,30.72 arc-57 v50.55,31.37
  Bottom 0.254: v50.55,31.37 51.12,33 arc76 50.84,33.84 50.81,33.86 arc34 50.23,34.04 46.36,34.04 arc-57 45.17,34.68 44.02,36.46 arc-33 43.94,36.71 43.94,39.62 36.83,46.74 36.72,57.82 arc-91 38.7,59.82 v39.5,59.82
SDIN/DB1  (via drill 0.61)
  Top 0.254: v40.64,69.85 40.11,69.85 arc45 38.84,69.32 38.63,69.11 arc45 38.1,67.84 38.1,66.2 U1.19 38.19,59.27 v38.23,58.67 | v54.23,30.35 53.95,30.35 IC2.23
  Bottom 0.254: v40.64,69.85 40.4,70.09 arc45 39.75,70.36 SJ1.1 | v38.23,58.67 38.1,46.86 44.45,40.64 44.45,36.96 arc36 44.53,36.73 45.7,35.1 arc54 46.79,34.54 53.31,34.54 arc-90 54.61,33.25 54.61,31.27 arc-45 v54.23,30.35
SIN  (via drill 0.61)
  Top 0.254: IC2.20 49.39,27.93 arc63 50.39,26.31 v52.45,25.27 D2.A | IC1.4 15.62,47.12 arc36 15.19,48.49 v14.99,48.77 | v41.27,30.1 35.74,24.31 arc44 35.56,23.88 v35.56,19.94
  Bottom 0.254: v14.99,48.77 17.45,46.08 arc-43 17.78,45.23 17.78,30.48 40.64,30.48 41.15,29.97 v41.27,30.1 | v35.56,19.94 35.69,19.81 46.91,19.81 arc60 51.41,22.41 52.32,24 v52.45,25.27
SOUT  (via drill 0.61)
  Top 0.254: IC1.29 15.62,27.95 arc45 15.91,27.27 v16.51,26.67 | IC3.4 65.66,34.81 arc-45 65.01,33.26 59.6,27.85 arc-45 56.76,26.67 v54.61,26.67
  Bottom 0.254: v16.51,26.67 v54.61,26.67
TX  (via drill 0.61)
  Top 0.254: IC2.33 52.83,39.65 v52.83,40.77
  Bottom 0.254: v52.83,40.77 53.34,41.27 53.34,59.56 60.96,59.56 CON6.5
XLAT  (via drill 0.61)
  Top 0.254: IC1.30 16.28,30.66 arc48 16.8,29.48 v17.53,28.83 | 58.23,35.75 58.29,35.81 58.29,36.54 R24.2 58.42,36.66 | IC3.30 65,45.7 arc-45 v65.28,46.36 | v59.44,38.1 58.17,35.81 58.23,35.75 | v50.04,33.02 50.51,33.14 arc-14 50.58,33.15 52.73,33.15 IC2.25 54.12,33.16 55.51,33.15 56.14,33.15 arc90 57.15,34.16 57.15,34.42 arc-90 58.04,35.31 arc127 58.42,36.07 58.23,35.88 58.23,35.75
  Bottom 0.254: v17.53,28.83 44.72,28.7 arc41 45.36,28.94 v50.04,33.02 | v65.28,46.36 65.28,43.69 59.87,38.28 arc-45 v59.44,38.1

## Text on the board
tPlace: [NullSpaceLabs] | X2 | www.032.la | charliex | http://www.gabotronics.com/ | layerOne | 2013
tNames: LNK | TX | RX | +5V | PWR | GND | arko | 0 | 8